# Altium PCB 上板20191026.PCBDOC
Units mm, origin at the board's own origin, x right, y up, seen from the top; angles counter-clockwise.
Board outline 161 x 86 mm, 2 copper layers (Top Layer, Bottom Layer); 4 components, 41 nets, 122 pads, 0 vias.
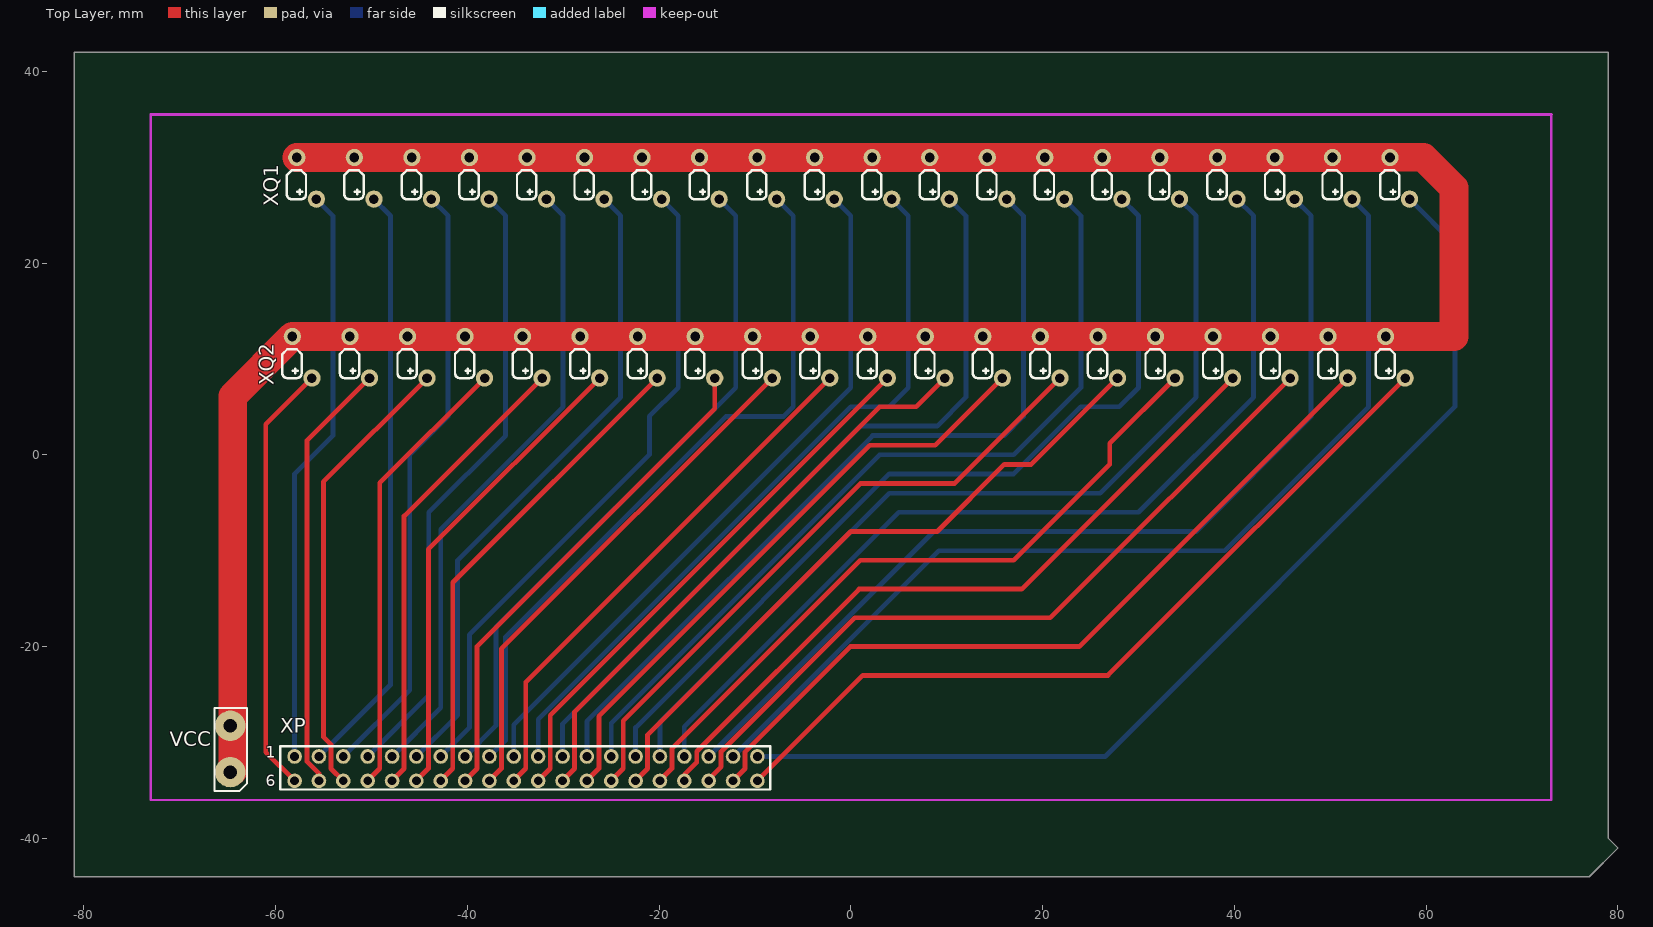
[diagram p0: Top Layer view]
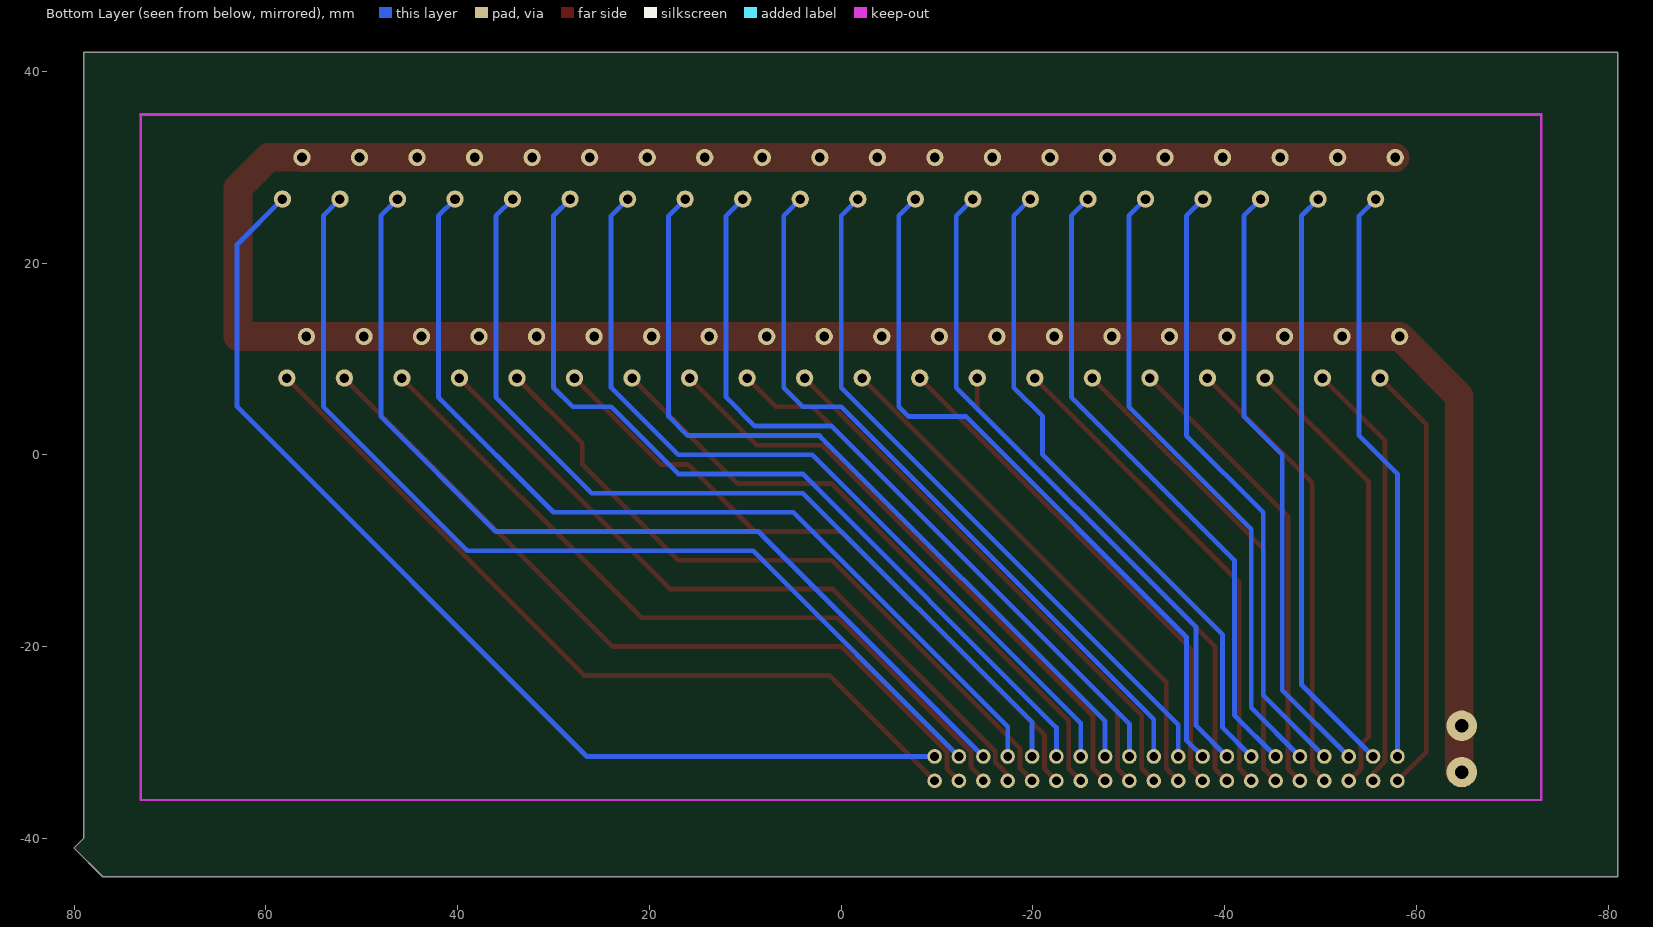
[diagram p1: Bottom Layer view, seen from below]

## Layer stack, top to bottom
Top Solder: solder mask 0.0102, Solder Resist, Dk 3.5
Top Layer: signal copper 0.0356
Dielectric1: dielectric 0.32, FR-4, Dk 4.8
Bottom Layer: signal copper 0.0356
Bottom Solder: solder mask 0.0102, Solder Resist, Dk 3.5

## Board outline
-81,42 -81,-44 77,-44 80,-41 79,-40 79,42 -80,42

## Design rules (kind name [scope] priority, off if disabled: settings)
Clearance [All] p1: gap=0.3 ignorepadtopadclearanceinfootprint=FALSE except(0: Arc-Hole Track-Hole SMDPad-Hole THPad-Hole Via-Hole Fill-Hole Poly-Hole Region-Hole Text-Hole)
DiffPairsRouting [All] p1: maxlimit=0.254 minlimit=0.254 mostfreqgap=0.254 toplayer_minwidth=0.381 toplayer_maxwidth=4 toplayer_prefwidth=0.381 bottomlayer_minwidth=0.381 bottomlayer_maxwidth=4 bottomlayer_prefwidth=0.381 maxuncoupledlength=12.7
FabricationTestPointUsage TestPointUsage [All] p1: valid=0 allowmultiple=FALSE
FabricationTestpoint Testpoint [All] p1: side=3 testpointundercomponent=TRUE minsize=1.016 maxsize=2.54 preferedsize=1.524 minholesize=0 maxholesize=1.016 preferedholesize=0.813 testpointgrid=0.025 allowsidetop=TRUE allowsidebottom=TRUE usegrid=TRUE gridtolerance=0
PolygonConnect [All] p1: connectstyle=Relief reliefconductorwidth=0.254 reliefentries=4 polygonreliefangle="90 Angle" airgapwidth=0.254
RoutingLayers [All] p1: top layer_v5=FALSE bottom layer_v5=TRUE
RoutingVias [All] p1: holewidth=0.8 width=1.6 viastyle="Through Hole" minholewidth=0.711 minwidth=1.27 maxholewidth=0.711 maxwidth=1.27
SilkToSolderMaskClearance SilkscreenOverComponentPads [IsPad] p1: minsilkscreentomaskgap=0.254 clearancetoexposedcopper=TRUE
SolderMaskExpansion [All] p1: expansion=0.102
Width [All] p1: maxlimit=2.54 minlimit=0.254 preferedwidth=0.381
25 further rules are at their usual default settings.

## Classes and differential pairs
component class 盲文原理图1: XP XQ1 XQ2

## Components (designator, comment, footprint, x,y, rotation, side; value= is the part's Value field where it differs from the comment)
XP "Header 21X2" XinPian -58,-34 r180 top
XQ1 "Header 20X2" XIANQUAN1 58.271,26.66 r180 top
XQ2 "Header 20X2" XIANQUAN1 57.809,8 r180 top
? "" N1A -64.704,-28.264 r180 top

## Footprints (in the part's own frame and the unit in brackets; to place one, negate y for a bottom-side part, rotate by r counter-clockwise, add the part's x,y. Pads: shape width x height; smd on the part's side, far side on the other; paste and mask are expansions set on the pad)
N1A [mil]
  round 125 hole 55: 1(0,0) 2(0,190)
  silkscreen extent -69,-74 65,268
XIANQUAN1 [mm]
  round 1.8 hole 1: 1(2.04,-4.34) 2(0,0) 3(8.04,-4.34) 4(6,0) 5(14.04,-4.34) 6(12,0) 7(20.04,-4.34) 8(18,0) 9(26.04,-4.34) 10(24,0) 11(32.04,-4.34) 12(30,0) 13(38.04,-4.34) 14(36,0) 15(44.04,-4.34) 16(42,0) 17(50.04,-4.34) 18(48,0) 19(56.04,-4.34) 20(54,0) 21(62.04,-4.34) 22(60,0) 23(68.04,-4.34) 24(66,0) 25(74.04,-4.34) 26(72,0) 27(80.04,-4.34) 28(78,0) 29(86.04,-4.34) 30(84,0) 31(92.04,-4.34) 32(90,0) 33(98.04,-4.34) 34(96,0) 35(104.04,-4.34) 36(102,0) 37(110.04,-4.34) 38(108,0) 39(116.04,-4.34) 40(114,0)
  silkscreen extent 1.08,-3 117.08,0
XinPian [mil]
  round 60 hole 36: 1(0,-100) 2(-100,-100) 3(-200,-100) 4(-300,-100) 5(-400,-100) 6(-500,-100) 7(-600,-100) 8(-700,-100) 9(-800,-100) 10(-900,-100) 11(-1000,-100) 12(-1100,-100) 13(-1200,-100) 14(-1300,-100) 15(-1400,-100) 16(-1500,-100) 17(-1600,-100) 18(-1700,-100) 19(-1800,-100) 20(-1900,-100) 21(-1900,0) 22(-1800,0) 23(-1700,0) 24(-1600,0) 25(-1500,0) 26(-1400,0) 27(-1300,0) 28(-1200,0) 29(-1100,0) 30(-1000,0) 31(-900,0) 32(-800,0) 33(-700,0) 34(-600,0) 35(-500,0) 36(-400,0) 37(-300,0) 38(-200,0) 39(-100,0) 40(0,0)
  silkscreen extent -1953,-142 59,35

## Part data
XP: library part "Header 22X2", "Header, 22-Pin, Dual row"
XQ1 XQ2: "Header, 20-Pin, Dual row"

## Nets (pads, with @x,y where several pads share a name; then routed paths per layer and width w, separated by ;. In a path a pad name is that pad's centre, name@x,y a point inside that pad or via, vN(x,y) a via of type N, cw(c..) or ccw(c..) an arc to the next point about the centre after c; other vN are vias at no path point)
GND: ?.1 ?.2 XQ1.1 XQ1.3 XQ1.5 XQ1.7 XQ1.9 XQ1.11 XQ1.13 XQ1.15 XQ1.17 XQ1.19 XQ1.21 XQ1.23 XQ1.25 XQ1.27 XQ1.29 XQ1.31 XQ1.33 XQ1.35 XQ1.37 XQ1.39 XQ2.1 XQ2.3 XQ2.5 XQ2.7 XQ2.9 XQ2.11 XQ2.13 XQ2.15 XQ2.17 XQ2.19 XQ2.21 XQ2.23 XQ2.25 XQ2.27 XQ2.29 XQ2.31 XQ2.33 XQ2.35 XQ2.37 XQ2.39 | length 306.8
  Top Layer w1.27: ?.2@-64.66,-33.1 ?.2@-64.475,-32.915
  Top Layer w1.524: XQ1.1 XQ1.1@56.261,31.03
  Top Layer w3: ?.2@-64.46,-33 -64.46,6.111 XQ2.39 XQ2.37 XQ2.35 XQ2.33 XQ2.31 XQ2.29 XQ2.27 XQ2.25 XQ2.23 XQ2.21 XQ2.19 XQ2.17 XQ2.15 XQ2.13 XQ2.11 XQ2.9 XQ2.7 XQ2.5 XQ2.3 XQ2.1 62.89,12.34 62.89,27.85 59.71,31.03 XQ1.1@56.261,31.03 ; XQ1.39 XQ1.21 XQ1.1
XQ1_1: XP.20 XQ1.2 | length 111.5
  Bottom Layer w0.5: XP.20 26.54,-31.46 63,5 63,21.931 XQ1.2
XQ1_2: XP.19 XQ1.4 | length 103.8
  Bottom Layer w0.5: XP.19 9.18,-10 39,-10 54,5 54,24.931 XQ1.4
XQ1_3: XP.18 XQ1.6 | length 100.9
  Bottom Layer w0.5: XP.18 8.64,-8 36,-8 48,4 48,24.931 XQ1.6
XQ1_4: XP.17 XQ1.8 | length 98.1
  Bottom Layer w0.5: XP.17 -17.36,-28.36 5,-6 30,-6 42,6 42,24.931 XQ1.8
XQ1_5: XP.16 XQ1.10 | length 94.9
  Bottom Layer w0.5: XP.16 -19.9,-27.9 4,-4 26,-4 36,6 36,24.931 XQ1.10
XQ1_6: XP.15 XQ1.12 | length 90.5
  Bottom Layer w0.5: XP.15 -22.44,-28.44 4,-2 17,-2 24,5 28,5 30,7 30,24.931 XQ1.12
XQ1_7: XP.14 XQ1.14 | length 87.3
  Bottom Layer w0.5: XP.14 -24.98,-27.98 3,0 17,0 24,7 24,24.931 XQ1.14
XQ1_8: XP.13 XQ1.16 | length 85.7
  Bottom Layer w0.5: XP.13 -27.52,-27.791 2.271,2 16,2 18,4 18,24.931 XQ1.16
XQ1_9: XP.12 XQ1.18 | length 81
  Bottom Layer w0.381: XQ1.18@10.25,26.66 XQ1.18
  Bottom Layer w0.5: XP.12 -30.06,-28.06 1,3 9,3 12,6 12,24.931 XQ1.18
XQ1_10: XP.11 XQ1.20 | length 77.2
  Bottom Layer w0.5: XP.11 -32.6,-27.6 0,5 4,5 6,7 6,24.931 XQ1.20
XQ1_11: XP.10 XQ1.22 | length 73.4
  Bottom Layer w0.5: XP.10 -35.14,-28.14 0,7 0,24.931 XQ1.22
XQ1_12: XP.9 XQ1.24 | length 75.5
  Bottom Layer w0.5: XP.9 -36,-29.78 -36,-19 -13,4 -7,4 -6,5 -6,24.931 XQ1.24
XQ1_13: XP.8 XQ1.26 | length 70.5
  Bottom Layer w0.5: XP.8 -37,-28.24 -37,-18 -12,7 -12,24.931 XQ1.26
XQ1_14: XP.7 XQ1.28 | length 69.1
  Bottom Layer w0.5: XP.7 -39.769,-28.469 -39.769,-18.769 -21,0 -21,4 -18,7 -18,24.931 XQ1.28
XQ1_15: XP.6 XQ1.30 | length 67.7
  Bottom Layer w0.5: XP.6 -41,-27.16 -41,-11 -24,6 -24,24.931 XQ1.30
XQ1_16: XP.5 XQ1.32 | length 66.2
  Bottom Layer w0.5: XP.5 -42.76,-26.38 -42.76,-7.76 -30,5 -30,24.931 XQ1.32
XQ1_17: XP.4 XQ1.34 | length 64.8
  Bottom Layer w0.5: XP.4 -44,-25.08 -44,-6 -36,2 -36,24.931 XQ1.34
XQ1_18: XP.3 XQ1.36 | length 63.4
  Bottom Layer w0.5: XP.3 -46,-24.54 -46,0 -42,4 -42,24.931 XQ1.36
XQ1_19: XP.2 XQ1.38 | length 61.9
  Bottom Layer w0.5: XP.2 -48,-24 -48,24.931 XQ1.38
XQ1_20: XP.1 XQ1.40 | length 60.5
  Bottom Layer w0.5: XP.1 -58,-2 -54,2 -54,24.931 XQ1.40
XQ2_1: XP.21 XQ2.2 | length 84.9
  Top Layer w0.5: XP.21 1.26,-23 26.809,-23 XQ2.2
XQ2_2: XP.22 XQ2.4 | length 82.5
  Top Layer w0.381: XP.22 XP.22@-12.28,-33.965
  Top Layer w0.5: XP.22@-12.28,-33.965 -11.028,-32.712 -11.028,-30.976 -0.051,-20 23.809,-20 XQ2.4
XQ2_3: XP.23 XQ2.6 | length 79.1
  Top Layer w0.381: XP.23 XP.23@-14.82,-33.82
  Top Layer w0.5: XP.23@-14.82,-33.82 -13.533,-32.533 -13.533,-30.941 0.409,-17 20.809,-17 XQ2.6
XQ2_4: XP.24 XQ2.8 | length 75.6
  Top Layer w0.381: XP.24 XP.24@-17.36,-33.36
  Top Layer w0.5: XP.24@-17.36,-33.36 -16.073,-32.072 -16.073,-30.941 0.869,-14 17.809,-14 XQ2.8
XQ2_5: XP.25 XQ2.10 | length 73.6
  Top Layer w0.381: XP.25 XP.25@-19.9,-33.965
  Top Layer w0.5: XP.25@-19.9,-33.965 -18.648,-32.712 -18.648,-30.648 1,-11 17,-11 27,-1 27,1.191 XQ2.10
XQ2_6: XP.26 XQ2.12 | length 69.7
  Top Layer w0.381: XP.26 XP.26@-22.44,-33.965
  Top Layer w0.5: XP.26@-22.44,-33.965 -21.188,-32.712 -21.188,-29.188 0,-8 9,-8 16,-1 18.809,-1 XQ2.12
XQ2_7: XP.27 XQ2.14 | length 67.1
  Top Layer w0.381: XP.27 XP.27@-24.98,-33.965
  Top Layer w0.5: XP.27@-24.98,-33.965 -23.728,-32.712 -23.728,-27.728 1,-3 10.809,-3 XQ2.14
XQ2_8: XP.28 XQ2.16 | length 63.9
  Top Layer w0.381: XP.28 XP.28@-27.52,-33.965
  Top Layer w0.5: XP.28@-27.52,-33.965 -26.268,-32.712 -26.268,-27.267 2,1 8.809,1 XQ2.16
XQ2_9: XP.29 XQ2.18 | length 60.7
  Top Layer w0.381: XP.29 XP.29@-30.06,-33.965
  Top Layer w0.5: XP.29@-30.06,-33.965 -28.808,-32.712 -28.808,-30.617 -28.808,-26.808 3,5 6.809,5 XQ2.18
XQ2_10: XP.30 XQ2.20 | length 57.1
  Top Layer w0.381: XP.30 XP.30@-32.6,-33.965
  Top Layer w0.5: XP.30@-32.6,-33.965 -31.348,-32.712 -31.348,-27.157 XQ2.20
XQ2_11: XP.31 XQ2.22 | length 55.6
  Top Layer w0.381: XP.31 XP.31@-35.14,-33.965
  Top Layer w0.5: XP.31@-35.14,-33.965 -33.888,-32.712 -33.888,-23.697 XQ2.22
XQ2_12: XP.32 XQ2.24 | length 54.2
  Top Layer w0.381: XP.32 XP.32@-37.68,-33.965
  Top Layer w0.5: XP.32@-37.68,-33.965 -36.428,-32.712 -36.428,-20.237 XQ2.24
XQ2_13: XP.33 XQ2.26 | length 52.8
  Top Layer w0.381: XP.33 XP.33@-40.22,-33.965
  Top Layer w0.5: XP.33@-40.22,-33.965 -38.968,-32.712 -38.968,-19.968 -14.191,4.809 XQ2.26
XQ2_14: XP.34 XQ2.28 | length 51.3
  Top Layer w0.381: XP.34 XP.34@-42.76,-33.965
  Top Layer w0.5: XP.34@-42.76,-33.965 -41.508,-32.712 -41.508,-13.317 XQ2.28
XQ2_15: XP.35 XQ2.30 | length 49.9
  Top Layer w0.381: XP.35 XP.35@-45.3,-33.965
  Top Layer w0.5: XP.35@-45.3,-33.965 -44.048,-32.712 -44.048,-9.857 XQ2.30
XQ2_16: XP.36 XQ2.32 | length 48.5
  Top Layer w0.381: XP.36 XP.36@-47.84,-33.965
  Top Layer w0.5: XP.36@-47.84,-33.965 -46.588,-32.712 -46.588,-6.397 XQ2.32
XQ2_17: XP.37 XQ2.34 | length 47
  Top Layer w0.381: XP.37 XP.37@-50.38,-33.965
  Top Layer w0.5: XP.37@-50.38,-33.965 -49.128,-32.712 -49.128,-2.937 XQ2.34
XQ2_18: XP.38 XQ2.36 | length 47.4
  Top Layer w0.381: XQ2.36@-43.786,8 XQ2.36@-43.751,8
  Top Layer w0.5: XP.38 -54.208,-32.712 -54.208,-30.208 -55,-29.415 -55,-2.809 XQ2.36
XQ2_19: XP.39 XQ2.38 | length 45.2
  Top Layer w0.5: XP.39 -55.46,-33.231 -56.713,-31.979 -56.713,1.478 XQ2.38
XQ2_20: XP.40 XQ2.40 | length 45.2
  Top Layer w0.5: XP.40 -61,-31 -61,3.191 XQ2.40

## Keep-outs
Keep-Out Layer:
  lines w0.254: -73,35.5 -73,-36 73.021,-36 73.021,35.5
  lines w0.3: -73,35.5 73.06,35.5

## Silkscreen, mask and mechanical layers (free items; w line width, h text height)
Top Overlay:
  text "VCC" at -71,-30.4 h1.52
  text "1" at -61,-32 h2.02
  text "6" at -61,-35 h2.02
Mechanical 1:
  circle w0.254: c-58.25,21.99 r0.65
  circle w0.254: c-55.75,21.99 r0.65
  circle w0.254: c-58.25,19.49 r0.65
  circle w0.254: c-1.75,19.49 r0.65
  circle w0.254: c-1.75,21.99 r0.65
  circle w0.254: c-1.75,16.99 r0.65
  circle w0.254: c-4.25,19.49 r0.65
  circle w0.254: c-4.25,21.99 r0.65
  circle w0.254: c-4.25,16.99 r0.65
  circle w0.254: c1.75,16.99 r0.65
  circle w0.254: c1.75,21.99 r0.65
  circle w0.254: c1.75,19.49 r0.65
  circle w0.254: c4.25,16.99 r0.65
  circle w0.254: c4.25,21.99 r0.65
  circle w0.254: c4.25,19.49 r0.65
  circle w0.254: c7.75,16.99 r0.65
  circle w0.254: c7.75,21.99 r0.65
  circle w0.254: c7.75,19.49 r0.65
  circle w0.254: c10.25,16.99 r0.65
  circle w0.254: c10.25,21.99 r0.65
  circle w0.254: c10.25,19.49 r0.65
  circle w0.254: c13.75,16.99 r0.65
  circle w0.254: c13.75,21.99 r0.65
  circle w0.254: c13.75,19.49 r0.65
  circle w0.254: c16.25,16.99 r0.65
  circle w0.254: c16.25,21.99 r0.65
  circle w0.254: c16.25,19.49 r0.65
  circle w0.254: c19.75,16.99 r0.65
  circle w0.254: c19.75,21.99 r0.65
  circle w0.254: c19.75,19.49 r0.65
  circle w0.254: c22.25,16.99 r0.65
  circle w0.254: c22.25,21.99 r0.65
  circle w0.254: c22.25,19.49 r0.65
  circle w0.254: c25.75,16.99 r0.65
  circle w0.254: c25.75,21.99 r0.65
  circle w0.254: c25.75,19.49 r0.65
  circle w0.254: c28.25,16.99 r0.65
  circle w0.254: c28.25,21.99 r0.65
  circle w0.254: c28.25,19.49 r0.65
  circle w0.254: c31.75,16.99 r0.65
  circle w0.254: c31.75,21.99 r0.65
  circle w0.254: c31.75,19.49 r0.65
  circle w0.254: c34.25,16.99 r0.65
  circle w0.254: c34.25,21.99 r0.65
  circle w0.254: c34.25,19.49 r0.65
  circle w0.254: c37.75,16.99 r0.65
  circle w0.254: c37.75,21.99 r0.65
  circle w0.254: c37.75,19.49 r0.65
  circle w0.254: c40.25,16.99 r0.65
  circle w0.254: c40.25,21.99 r0.65
  circle w0.254: c40.25,19.49 r0.65
  circle w0.254: c43.75,16.99 r0.65
  circle w0.254: c43.75,21.99 r0.65
  circle w0.254: c43.75,19.49 r0.65
  circle w0.254: c46.25,16.99 r0.65
  circle w0.254: c46.25,21.99 r0.65
  circle w0.254: c46.25,19.49 r0.65
  circle w0.254: c49.75,16.99 r0.65
  circle w0.254: c49.75,21.99 r0.65
  circle w0.254: c49.75,19.49 r0.65
  circle w0.254: c52.25,16.99 r0.65
  circle w0.254: c52.25,21.99 r0.65
  circle w0.254: c52.25,19.49 r0.65
  circle w0.254: c55.75,16.99 r0.65
  circle w0.254: c55.75,21.99 r0.65
  circle w0.254: c55.75,19.49 r0.65
  circle w0.254: c58.25,16.99 r0.65
  circle w0.254: c58.25,21.99 r0.65
  circle w0.254: c58.25,19.49 r0.65
  circle w0.254: c-10.25,16.99 r0.65
  circle w0.254: c-10.25,21.99 r0.65
  circle w0.254: c-10.25,19.49 r0.65
  circle w0.254: c-7.75,16.99 r0.65
  circle w0.254: c-7.75,21.99 r0.65
  circle w0.254: c-7.75,19.49 r0.65
  circle w0.254: c-16.25,16.99 r0.65
  circle w0.254: c-16.25,21.99 r0.65
  circle w0.254: c-16.25,19.49 r0.65
  circle w0.254: c-13.75,16.99 r0.65
  circle w0.254: c-13.75,21.99 r0.65
  circle w0.254: c-13.75,19.49 r0.65
  circle w0.254: c-22.25,16.99 r0.65
  circle w0.254: c-22.25,21.99 r0.65
  circle w0.254: c-22.25,19.49 r0.65
  circle w0.254: c-19.75,16.99 r0.65
  circle w0.254: c-19.75,21.99 r0.65
  circle w0.254: c-19.75,19.49 r0.65
  circle w0.254: c-28.25,16.99 r0.65
  circle w0.254: c-28.25,21.99 r0.65
  circle w0.254: c-28.25,19.49 r0.65
  circle w0.254: c-25.75,16.99 r0.65
  circle w0.254: c-25.75,21.99 r0.65
  circle w0.254: c-25.75,19.49 r0.65
  circle w0.254: c-34.25,16.99 r0.65
  circle w0.254: c-34.25,21.99 r0.65
  circle w0.254: c-34.25,19.49 r0.65
  circle w0.254: c-31.75,16.99 r0.65
  circle w0.254: c-31.75,21.99 r0.65
  circle w0.254: c-31.75,19.49 r0.65
  circle w0.254: c-40.25,16.99 r0.65
  circle w0.254: c-40.25,21.99 r0.65
  circle w0.254: c-40.25,19.49 r0.65
  circle w0.254: c-37.75,16.99 r0.65
  circle w0.254: c-37.75,21.99 r0.65
  circle w0.254: c-37.75,19.49 r0.65
  circle w0.254: c-46.25,16.99 r0.65
  circle w0.254: c-46.25,21.99 r0.65
  circle w0.254: c-46.25,19.49 r0.65
  circle w0.254: c-43.75,16.99 r0.65
  circle w0.254: c-43.75,21.99 r0.65
  circle w0.254: c-43.75,19.49 r0.65
  circle w0.254: c-52.25,16.99 r0.65
  circle w0.254: c-52.25,21.99 r0.65
  circle w0.254: c-52.25,19.49 r0.65
  circle w0.254: c-49.75,16.99 r0.65
  circle w0.254: c-49.75,21.99 r0.65
  circle w0.254: c-49.75,19.49 r0.65
  circle w0.254: c-58.25,16.99 r0.65
  circle w0.254: c-55.75,16.99 r0.65
  circle w0.254: c-55.75,19.49 r0.65
  circle w0.254: c-67.5,25 r1.5
  circle w0.254: c-67.5,19.5 r1.5
  circle w0.254: c-67.5,14 r1.5
  circle w0.254: c67.5,14 r1.5
  circle w0.254: c67.5,19.5 r1.5
  circle w0.254: c67.5,25 r1.5
  circle w0.254: c-24,0 r1.5
  circle w0.254: c24,0 r1.5